# Altium PCB PocketLab_DMM_EVT0.PcbDoc (part 1 of 3)
Units mm, origin at the board's own origin, x right, y up, seen from the top; angles counter-clockwise.
Board outline 62 x 90 mm, 4 copper layers (Top Layer, GND, PWR_SIG, Bottom Layer), stack 1.04 mm thick; 103 components, 76 nets, 390 pads, 94 vias.
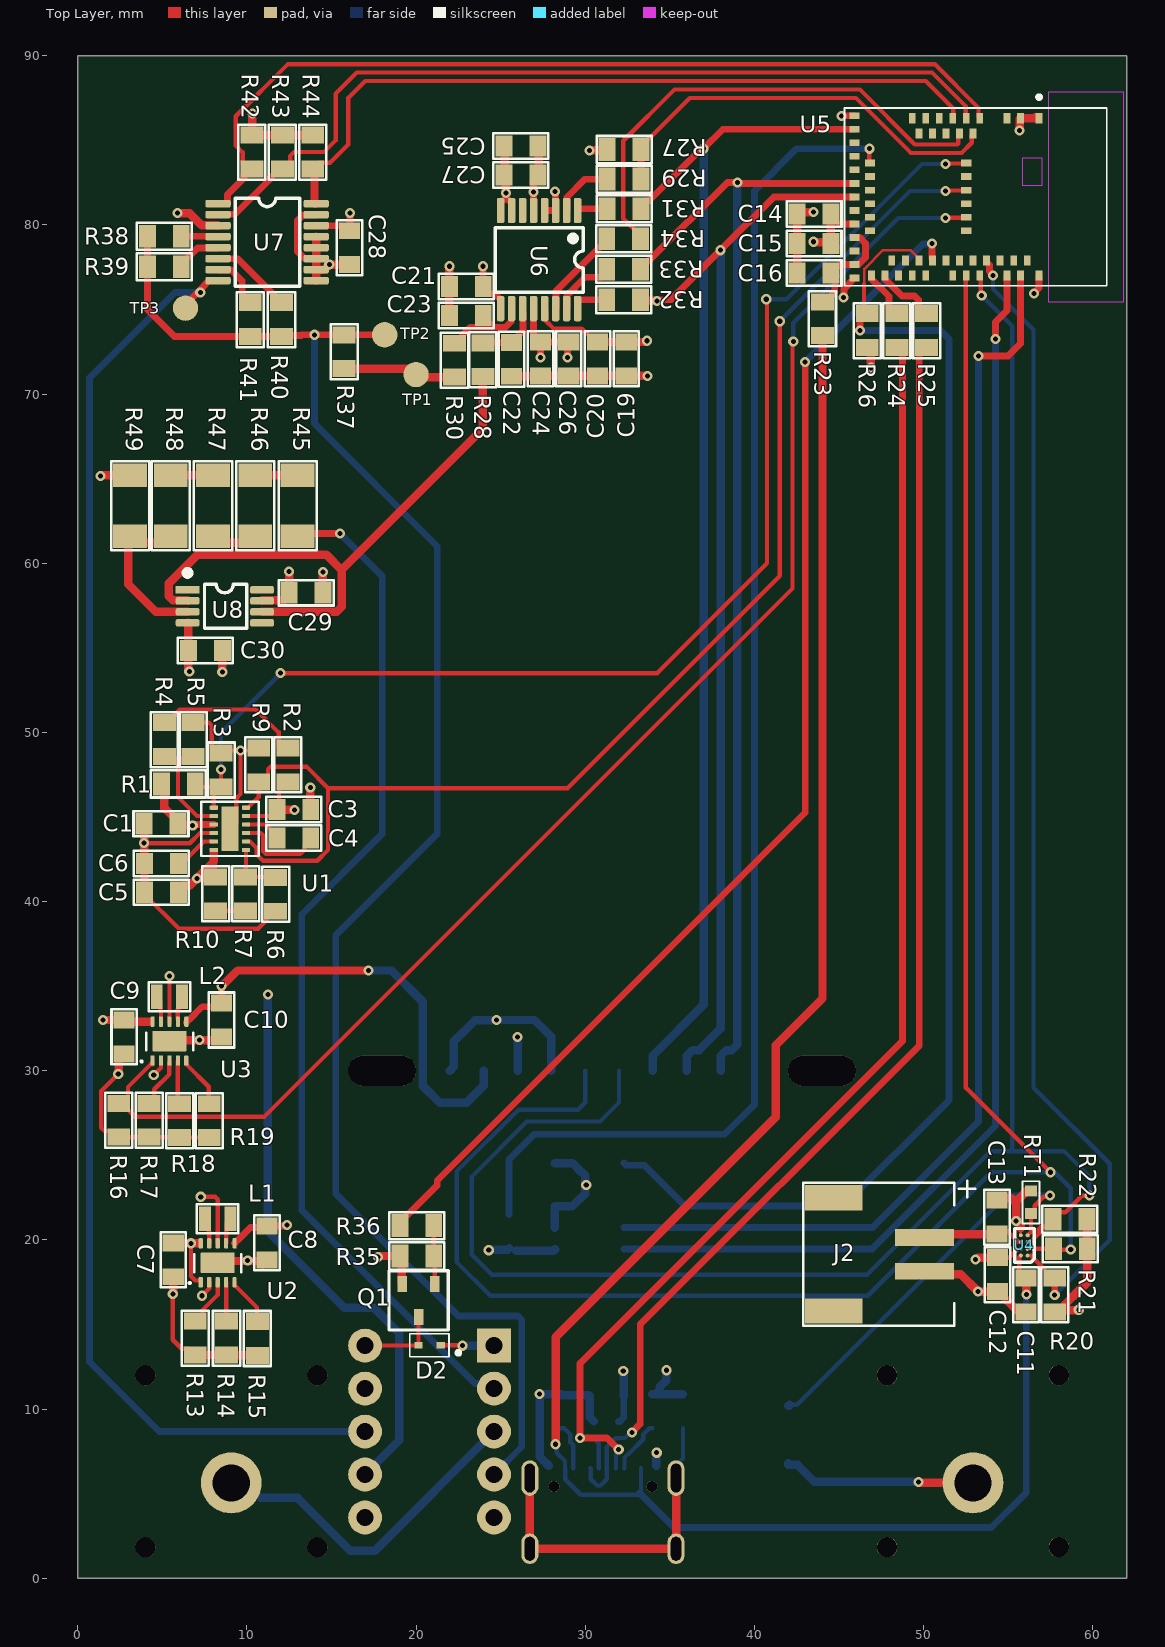
[diagram p0: Top Layer view]
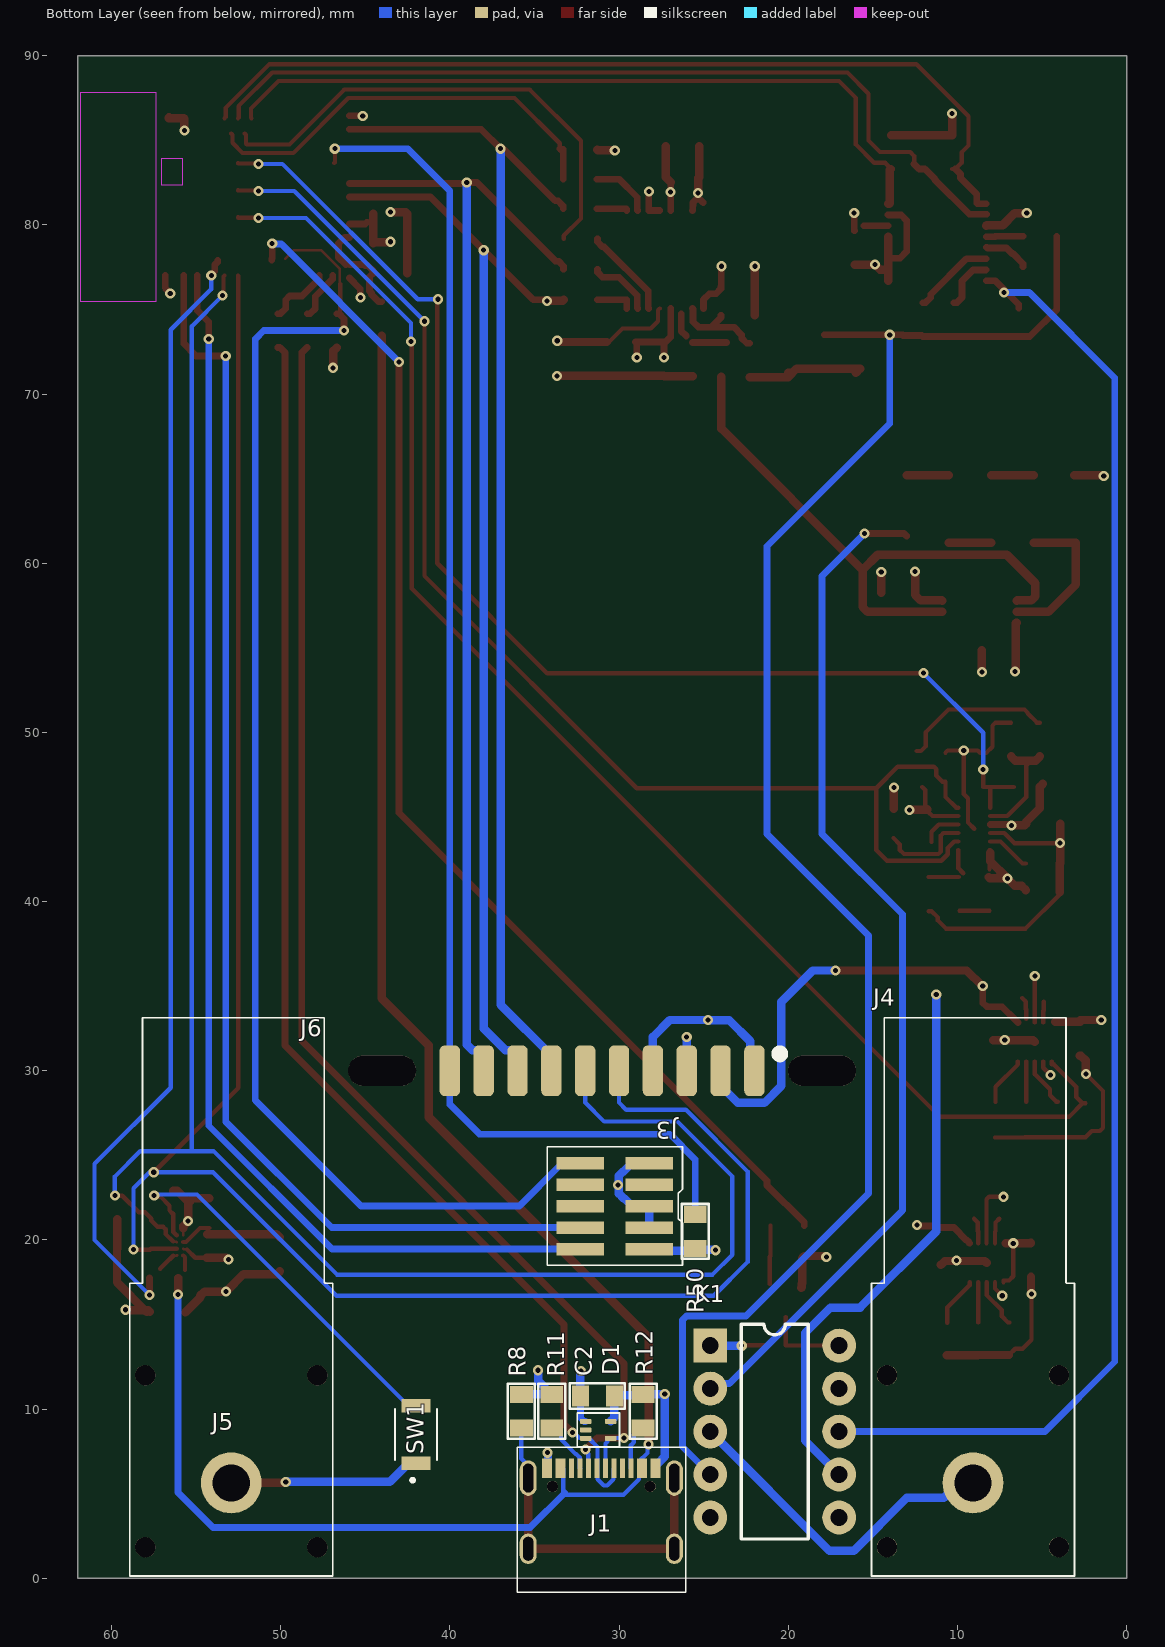
[diagram p1: Bottom Layer view, seen from below]
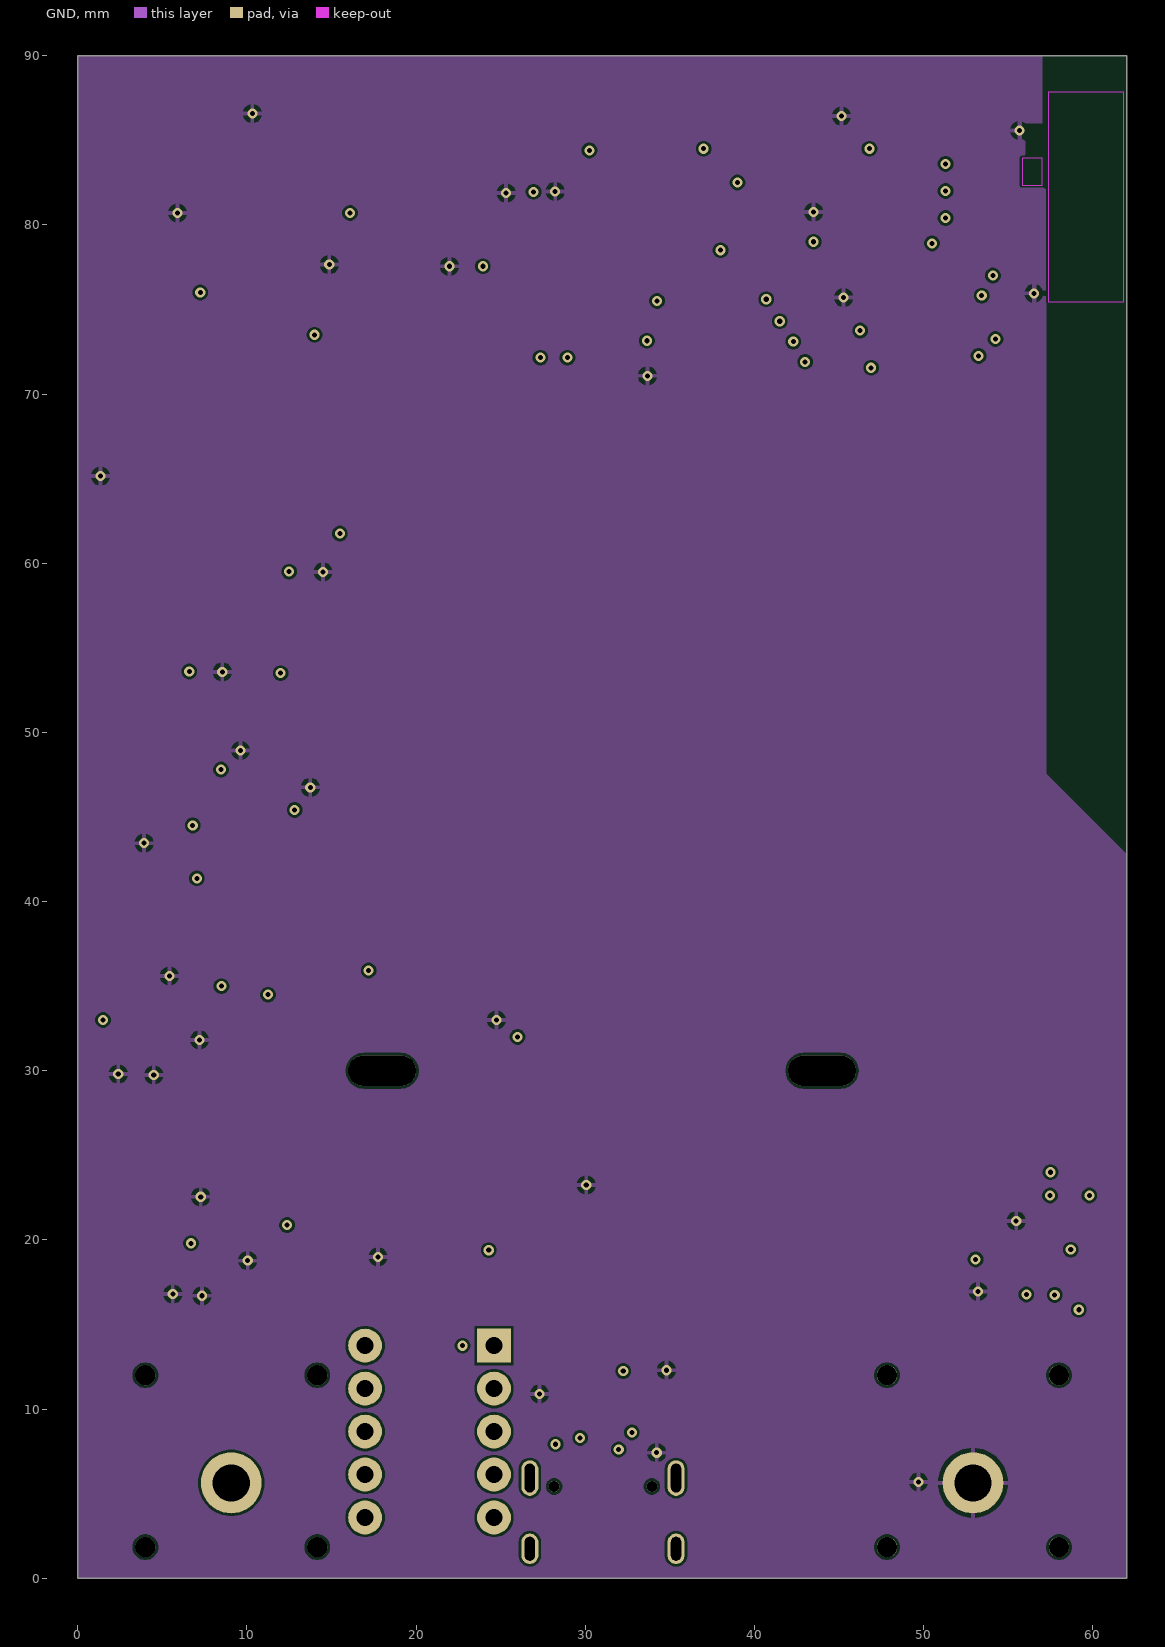
[diagram p2: GND]
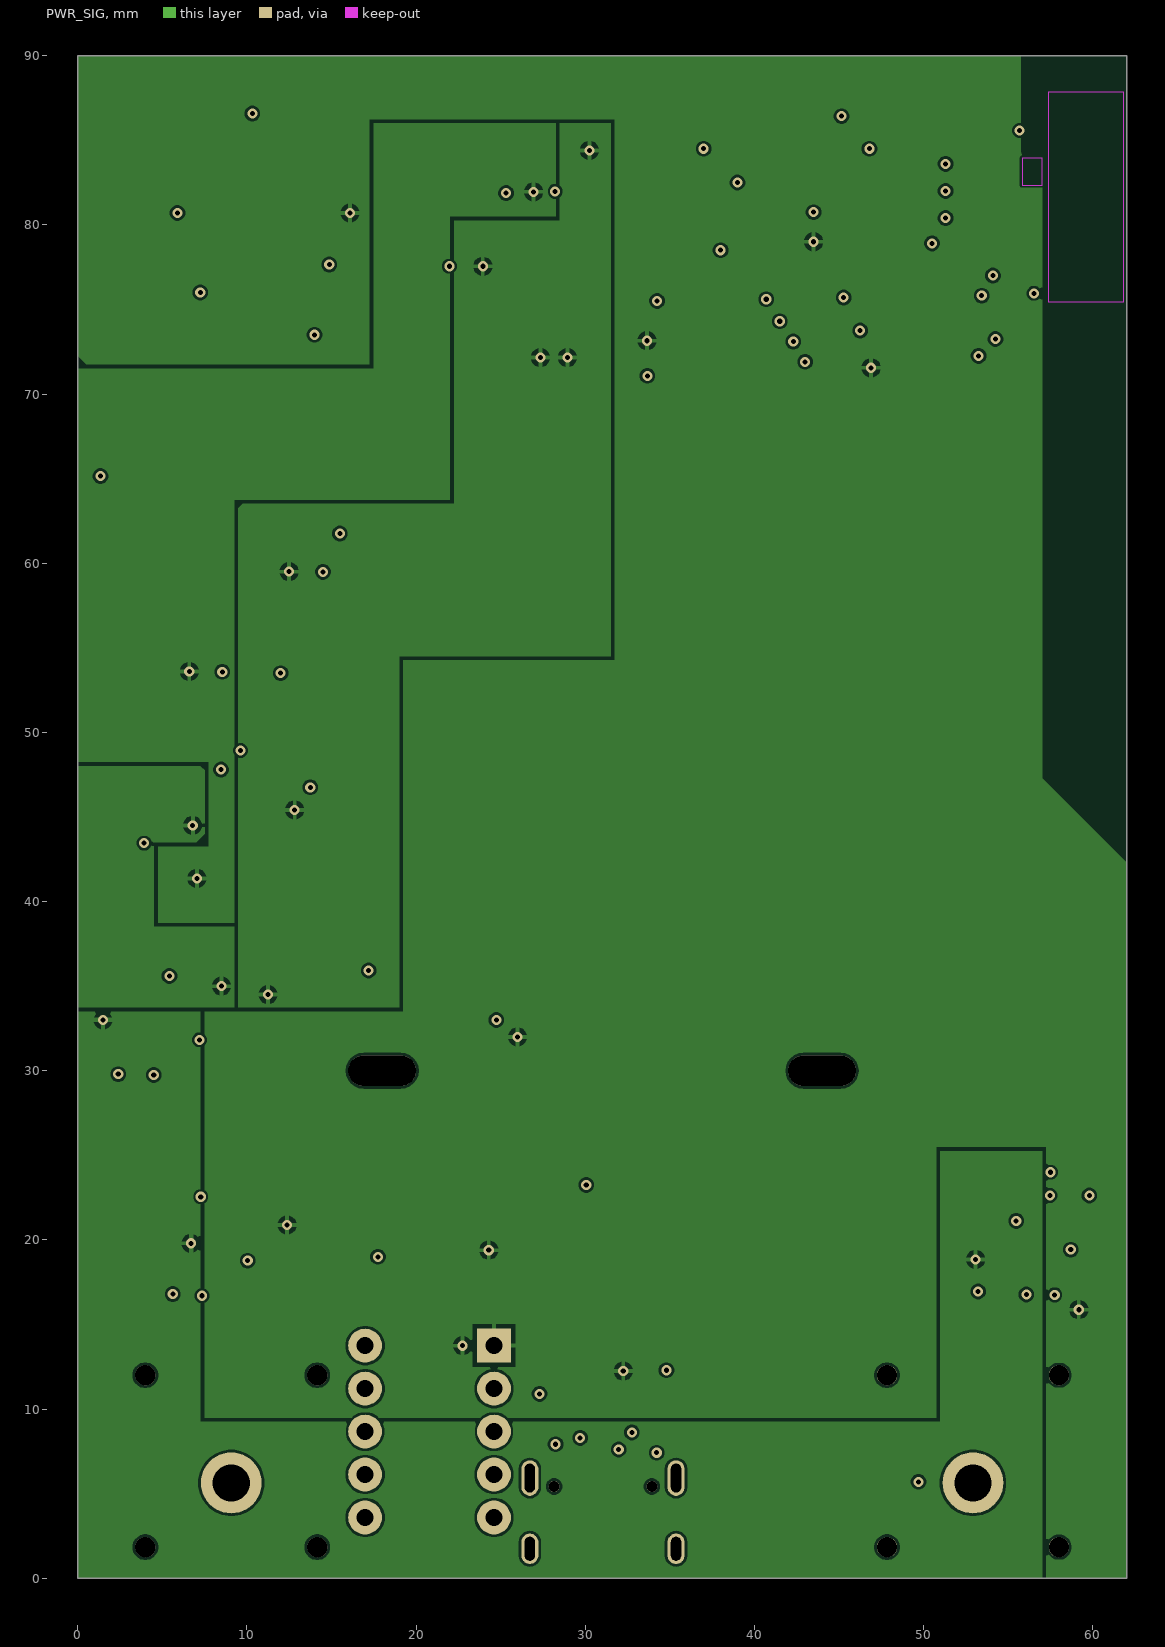
[diagram p3: PWR_SIG]
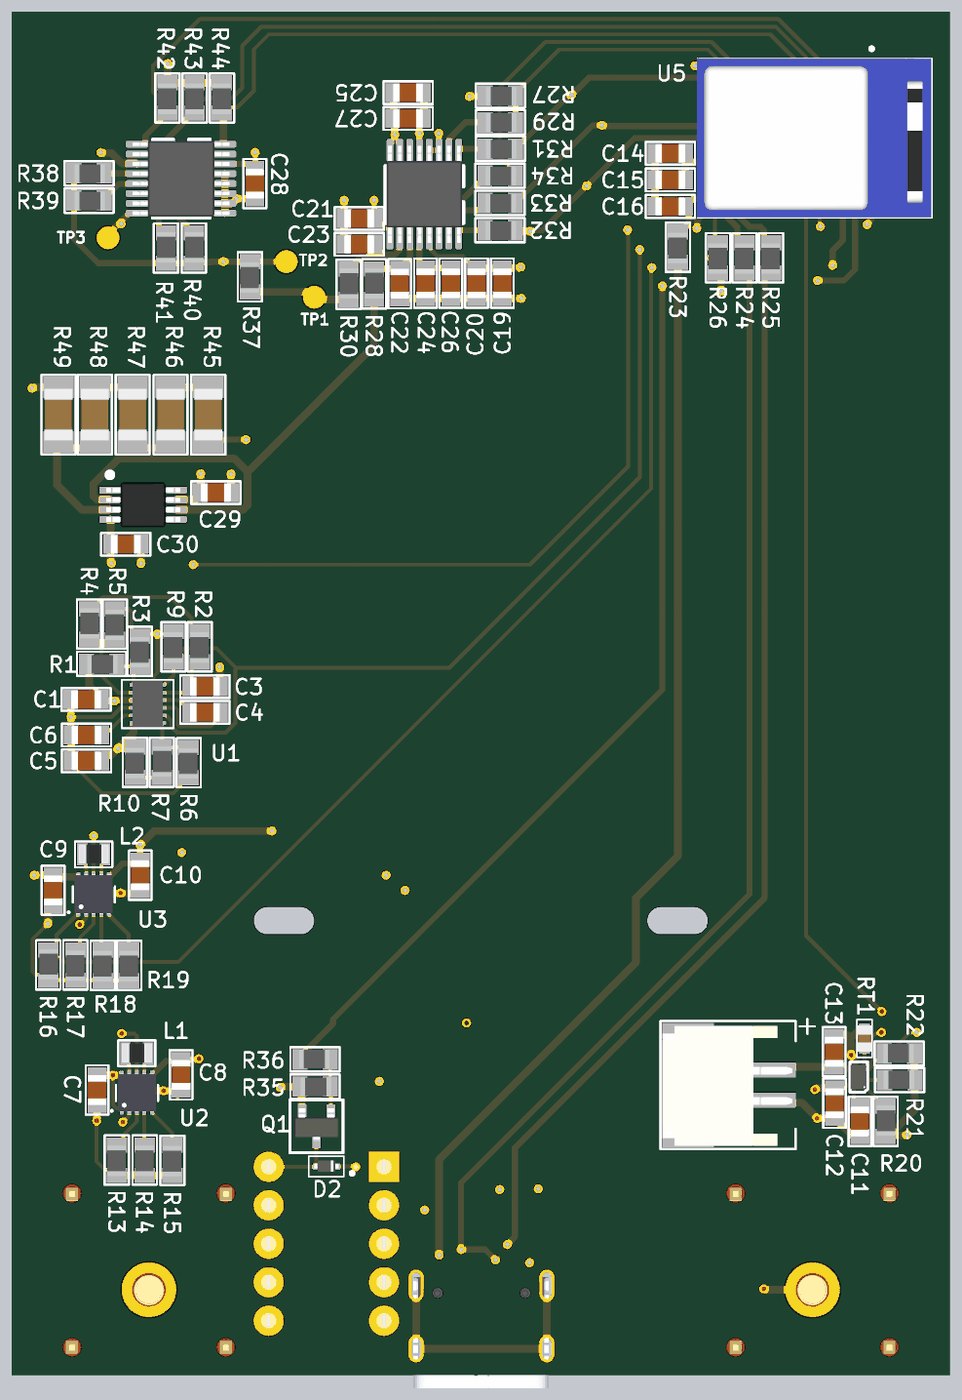
[diagram p4: 3D render of the assembled board from above, using the file's embedded part models]
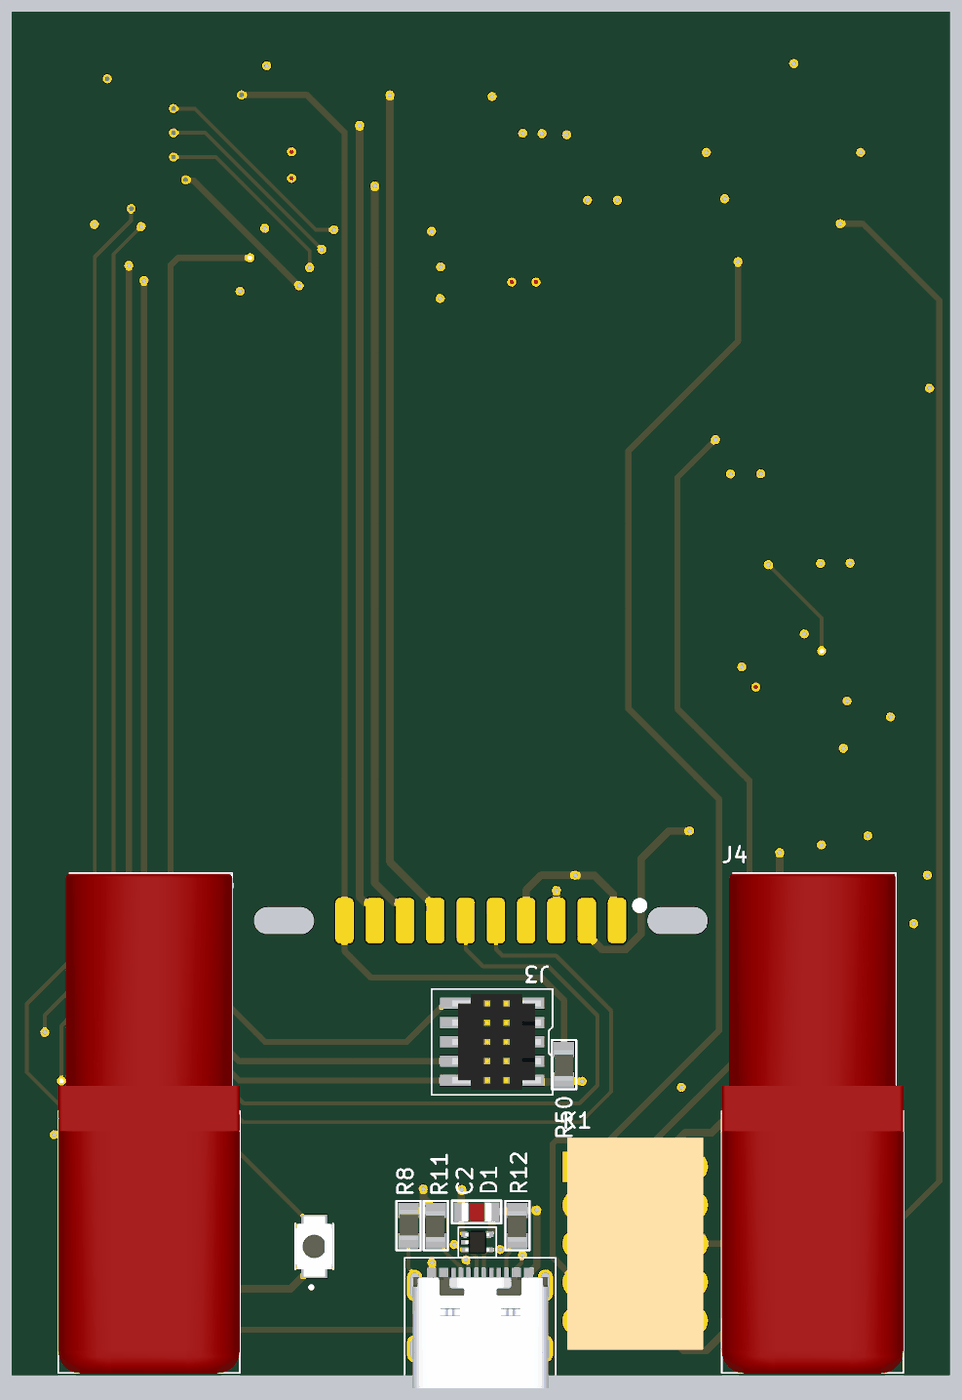
[diagram p5: 3D render of the assembled board from below, using the file's embedded part models]

## Layer stack, top to bottom
Top Solder: solder mask 0.0102, Solder Resist, Dk 3.5
Top Layer: signal copper 0.035
Dielectric 2: prepreg 0.15, PP-006, Dk 4.1
GND: signal copper 0.035
Dielectric 1: dielectric 0.6, FR-4, Dk 4.8
PWR_SIG: signal copper 0.035
Dielectric 3: prepreg 0.15, PP-006, Dk 4.1
Bottom Layer: signal copper 0.035
Bottom Solder: solder mask 0.0102, Solder Resist, Dk 3.5

## Board outline
0,0 0,90 62,90 62,0

## Design rules (kind name [scope] priority, off if disabled: settings)
Clearance [All] p1: gap=0.15 ignorepadtopadclearanceinfootprint=TRUE
PolygonConnect [All] p1: connectstyle=Relief reliefconductorwidth=0.254 reliefentries=4 polygonreliefangle="90 Angle" airgapwidth=0.254
RoutingVias [All] p1: holewidth=0.711 width=1.27 viastyle="Through Hole" minholewidth=0.3 minwidth=0.6 maxholewidth=0.3 maxwidth=0.6
SolderMaskExpansion [All] p1: expansion=0.05 istentingtop=FALSE
SupplyNets "Schematic Supply Nets_5" [InNet('3V3')] p1: voltage=0.000
SupplyNets "Schematic Supply Nets_4" [InNet('+2V5A')] p2: voltage=0.000
SupplyNets "Schematic Supply Nets_2" [InNet('-2V5A')] p3: voltage=0.000
SupplyNets "Schematic Supply Nets_1" [InNet('5V')] p4: voltage=0.000
SupplyNets "Schematic Supply Nets" [InNet('GND')] p5: voltage=0.000
Width [All] p1: maxlimit=0.5 minlimit=0.15 preferedwidth=0.254
30 further rules are at their usual default settings.

## Classes and differential pairs
component class 70_MODULE_INTERFACE: J4 J5 J6 R50
component class 60_RESISTANCE_FRONTEND: C28 R37 R38 R39 R40 R41 R42 R43 R44 TP1 TP2 TP3 U7
component class 50_VOLTAGE_FRONTEND: C29 C30 R45 R46 R47 R48 R49 U8
component class 40_INPUT_ROUTING: D2 K1 Q1 R35 R36
component class 30_ADC: C19 C20 C21 C22 C23 C24 C25 C26 C27 R27 R28 R29 R30 R31 R32 R33 R34 U6
component class 20_MCU_BLE: C14 C15 C16 J3 R23 R24 R25 R26 U5
component class 10_POWER: C1 C2 C3 C4 C5 C6 C7 C8 C9 C10 C11 C12 C13 D1 J1 J2 L1 L2 R1 R2 R3 R4 R5 R6 R7 R8 R9 R10 R11 R12 R13 R14 R15 R16 R17 R18 R19 R20 R21 R22 RT1 SW1 U1 U2 U3 U4

## Components (designator, comment, footprint, x,y, rotation, side; value= is the part's Value field where it differs from the comment)
C1 "4.7uF" C0805 4.927,44.602 r180 top
C2 "100nF" C0805 31.275,10.775 r180 bottom
C3 "2.2uF" C0805 12.777,45.452 r180 top
C4 "1.0uF" C0805 12.777,43.752 r0 top
C5 "2.2uF" C0805 4.952,40.552 r0 top
C6 "4.7uF" C0805 4.952,42.252 r0 top
C7 "10uF" C0805 5.65,18.825 r270 top
C8 "22uF" C0805 11.2,19.825 r90 top
C9 "10uF" C0805 2.75,32 r270 top
C10 "22uF" C0805 8.5,33 r90 top
C11 "1uF" C0805 56.05,16.75 r270 top
C12 "10uF" C0805 54.375,17.95 r270 top
C13 "1uF" C0805 54.35,21.35 r90 top
C14 "100nF" C0805 43.525,80.65 r180 top
C15 "10uF" C0805 43.525,78.9 r180 top
C16 "10uF" C0805 43.525,77.15 r180 top
C19 "1.0uF" C0805 32.425,72.075 r90 top
C20 "100nF" C0805 30.725,72.075 r90 top
C21 "100nF" C0805 22.975,76.35 r0 top
C22 "10nF" C0805 25.65,72.05 r270 top
C23 "10nF" C0805 22.975,74.65 r0 top
C24 "100nF" C0805 27.35,72.075 r90 top
C25 "100nF" C0805 26.2,84.65 r0 top
C26 "1.0uF" C0805 29.025,72.075 r90 top
C27 "1.0uF" C0805 26.2,82.95 r180 top
C28 "100nF" C0805 16.075,78.65 r90 top
C29 "100nF" C0805 13.5,58.25 r0 top
C30 "100nF" C0805 7.55,54.85 r0 top
D1 "TPD2E001DRLR" TPD2E001DRLR 31.975,9.275 r180 bottom value=1.5pF
D2 "1N914BWT" 1N914BWT 20.8,13.775 r180 top value=4pF
J1 "USB4105-GF-A" USB4105-GF-A 31.05,1.745 r180 bottom
J2 "S2B-PH-SM4-TB" S2B-PH-SM4-TB 48.3,19.15 r270 top
J3 "FTSH-105-01-L-DV-K" FTSH-105-01-L-DV-K 30.25,22 r90 bottom
J4 "FCR7350R/B" FCR7350_S16-PC 9.08,5.64 r270 bottom
J5 "FCR7350R/B" FCR7350_S16-PC 52.92,5.64 r270 bottom
J6 "10-PIN BUS" MODULE_BUS_10_TAB_SLOT 31,30 r0 bottom
K1 "TQ2-3V (ATQ201)" TQ2-3V 20.8,8.675 r180 bottom
L1 "2.2uH" WE_PMCI_201210 8.275,21.25 r0 top value=2.2µH
L2 "2.2uH" WE_PMCI_201210 5.425,34.375 r0 top value=2.2µH
Q1 "MMBT3904LT1G" MMBT3904 20.15,16.425 r180 top
R1 "11K" R0805 5.952,46.952 r0 top value=10kΩ
R2 "100K" R0805 12.427,48.077 r270 top value=10kΩ
R3 "21K" R0805 8.477,47.777 r270 top value=10kΩ
R4 "8.25K" R0805 5.127,49.577 r90 top value=10kΩ
R5 "100K" R0805 6.827,49.577 r270 top value=10kΩ
R6 "100K" R0805 11.702,40.427 r270 top value=10kΩ
R7 "5.1K" R0805 9.927,40.452 r90 top value=10kΩ
R8 "0R" R0805 35.775,9.875 r90 bottom value=10kΩ
R9 "100K" R0805 10.702,48.077 r270 top value=10kΩ
R10 "100K" R0805 8.152,40.452 r270 top value=10kΩ
R11 "5.1K" R0805 33.975,9.875 r270 bottom value=10kΩ
R12 "5.1K" R0805 28.575,9.875 r270 bottom value=10kΩ
R13 "36.5K" R0805 6.95,14.2 r270 top value=10kΩ
R14 "0R" R0805 8.8,14.2 r270 top value=10kΩ
R15 "16.2K" R0805 10.625,14.175 r270 top value=10kΩ
R16 "100K" R0805 2.425,27.075 r90 top value=10kΩ
R17 "36.5K" R0805 4.225,27.075 r270 top value=10kΩ
R18 "8.25K" R0805 6.025,27.05 r270 top value=10kΩ
R19 "36.5K" R0805 7.775,27.05 r270 top value=10kΩ
R20 "10K" R0805 57.75,16.75 r90 top value=10kΩ
R21 "10K" R0805 58.675,19.475 r180 top value=10kΩ
R22 "10K" R0805 58.65,21.225 r180 top value=10kΩ
R23 "2.2R" R0805 44.025,74.45 r270 top value=10kΩ
R24 "27R" R0805 48.425,73.75 r270 top value=10kΩ
R25 "27R" R0805 50.175,73.75 r270 top value=10kΩ
R26 "10K" R0805 46.675,73.75 r270 top value=10kΩ
R27 "10K" R0805 32.3,84.45 r0 top value=10kΩ
R28 "100R" R0805 23.95,72.025 r90 top value=10kΩ
R29 "100R" R0805 32.3,82.7 r0 top value=10kΩ
R30 "100R" R0805 22.275,72 r90 top value=10kΩ
R31 "100R" R0805 32.3,80.95 r0 top value=10kΩ
R32 "100R" R0805 32.275,75.575 r0 top value=10kΩ
R33 "100R" R0805 32.275,77.375 r0 top value=10kΩ
R34 "100R" R0805 32.275,79.175 r0 top value=10kΩ
R35 "100K" R0805 20.05,19.05 r0 top value=10kΩ
R36 "1K" R0805 20.05,20.85 r180 top value=10kΩ
R37 "10K" R0805 15.75,72.5 r270 top value=10kΩ
R38 "10K RREF" R0805 5.125,79.325 r0 top value=10kΩ
R39 "100K RREF" R0805 5.125,77.525 r0 top value=10kΩ
R40 "360K RREF" R0805 12.05,74.4 r90 top value=10kΩ
R41 "1M RREF" R0805 10.2,74.4 r90 top value=10kΩ
R42 "100K" R0805 10.3,84.3 r270 top value=10kΩ
R43 "100K" R0805 12.1,84.3 r270 top value=10kΩ
R44 "100K" R0805 13.9,84.3 r270 top value=10kΩ
R45 "3M" R1206 13,63.4 r90 top value=3MΩ
R46 "3M" R1206 10.5,63.4 r270 top value=3MΩ
R47 "3M" R1206 8,63.4 r90 top value=3MΩ
R48 "3M" R1206 5.5,63.4 r270 top value=3MΩ
R49 "360K" R1206 3.1,63.4 r270 top value=360kΩ
R50 "10K" R0805 25.5,20.5 r270 bottom value=10kΩ
RT1 "T10K" NCU18_1608 56.35,22.225 r270 top value=10kΩ
SW1 "B3U-1000P" B3U-1000P 42,8.5 r90 bottom
TP1 "TEST POINT" TP_SMD_1P5MM 20,71.15 r180 top
TP2 "TEST POINT" TP_SMD_1P5MM 18.15,73.5 r180 top
TP3 "TEST POINT" TP_SMD_1P5MM 6.375,75.075 r0 top
U1 "LM27762" LM27762 9.002,44.302 r0 top
U2 "TPS63900DSKR" TPS63900 8.275,18.65 r90 top
U3 "TPS63900DSKR" TPS63900 5.425,31.75 r90 top
U4 "BQ25180YBGR" BQ25180 55.95,19.675 r180 top
U5 "MDBT50Q-1MV2" NRF52840_MDBT50Q-1MV2 53.125,81.65 r270 top
U6 "ADS1220IPWR" ADS1220IPWR 27.275,77.95 r270 top
U7 "TMUX1109PWR" TMUX1109PWR 11.2,78.975 r0 top value=2.5Ω
U8 "OPA197IDGKR" OPA197IDGKR 8.697,57.45 r0 top

## Footprints (in the part's own frame and the unit in brackets; to place one, negate y for a bottom-side part, rotate by r counter-clockwise, add the part's x,y. Pads: shape width x height; smd on the part's side, far side on the other; paste and mask are expansions set on the pad)
1N914BWT [mm]
  rect 0.48x0.4 smd: 1(-0.66,0) 2(0.66,0)
  silkscreen extent -1.8,-0.67 1.17,0.67, body extent -0.8,-0.43 0.8,0.37, height 0.71
ADS1220IPWR [mm]
  rrect50% 1.5x0.45 smd mask+0.05: 1(-2.9,2.275) 2(-2.9,1.625) 3(-2.9,0.975) 4(-2.9,0.325) 5(-2.9,-0.325) 6(-2.9,-0.975) 7(-2.9,-1.625) 8(-2.9,-2.275) 9(2.9,-2.275) 10(2.9,-1.625) 11(2.9,-0.975) 12(2.9,-0.325) 13(2.9,0.325) 14(2.9,0.975) 15(2.9,1.625) 16(2.9,2.275)
  silkscreen extent -1.88,-2.6 1.93,2.6, body extent -3.2,-2.5 3.2,2.5, height 1.13
B3U-1000P [mm]
  rect 0.8x1.7 smd: 1(-1.7,0) 2(1.7,0)
  silkscreen extent -2.8,-1.25 1.5,1.25, body extent -2,-1.25 2,1.25, height 1.76
BQ25180 [mm]
  round 0.23 smd paste-2539.97 mask+0.025: A1(-0.2,0.6) A2(0.2,0.6) B1(-0.2,0.2) B2(0.2,0.2) C1(-0.2,-0.2) C2(0.2,-0.2) D1(-0.2,-0.6) D2(0.2,-0.6)
  silkscreen extent -0.6,-1 0.55,1, body extent -0.52,-0.79 0.52,0.79, height 0.5
C0805 [mm]
  rect 1x1.25 smd: 1(-1,0) 2(1,0)
  silkscreen extent -1.63,-0.75 1.63,0.75, body extent -1,-0.63 1,0.63, height 1.41
FCR7350_S16-PC [mm] "Banana Jack Connector Standard Banana Solder"
  round 3.6 hole 2.2 paste-2539.97 mask+0.1: 1(0,0)
  round 1.2 hole 1.2 unplated paste-2539.97: M1(-6.36,5.08) M2(3.8,5.08) M3(3.8,-5.08) M4(-6.36,-5.08)
  silkscreen extent -27.5,-6 5.5,6, body extent -27.47,-6 5.53,6, height 11.51
FTSH-105-01-L-DV-K [mm] "CONN HEADER SMD 10POS 1.27MM"
  rect 0.74x2.8 smd: 1(-2.54,-2.04) 2(-2.54,2.04) 3(-1.27,-2.04) 4(-1.27,2.04) 5(0,-2.04) 6(0,2.04) 7(1.27,-2.04) 8(1.27,2.04) 9(2.54,-2.04) 10(2.54,2.04)
  silkscreen extent -3.5,-4 3.5,4, body extent -3.18,-3.22 3.17,2.62, height 6.13
LM27762 [mm] "IC REG CHARGE PUMP ADJ DL 12WSON"
  rrect40% 0.5x0.25 smd mask+0.05: 1(-0.95,1.25) 2(-0.95,0.75) 3(-0.95,0.25) 4(-0.95,-0.25) 5(-0.95,-0.75) 6(-0.95,-1.25) 7(0.95,-1.25) 8(0.95,-0.75) 9(0.95,-0.25) 10(0.95,0.25) 11(0.95,0.75) 12(0.95,1.25)
  rect 1x2.65 smd paste-2539.97 mask+0.05: 13(0,0)
  silkscreen extent -1.7,-1.6 1.7,1.6, body extent -1,-1.5 1,1.5, height 0.8
MMBT3904 [mm]
  rect 0.56x0.95 smd mask+0.05: 1(-0.95,-0.975) 2(0.95,-0.975) 3(0,0.975)
  silkscreen extent -1.75,-1.75 1.75,1.75, body extent -1.45,-1.2 1.45,1.29, height 1.12
MODULE_BUS_10_TAB_SLOT [mm] "10-pin stackable module interface for power, I2C, SPI, and shared interrupt"
  rrect50% 1.2x3 smd paste-2539.97 mask+0.1: 1(-9,0) 2(-7,0) 3(-5,0) 4(-3,0) 5(-1,0) 6(1,0) 7(3,0) 8(5,0) 9(7,0) 10(9,0)
  oval 4x1.8 hole 1.8 slot 4 at 0 deg unplated paste-2539.97: SLOT_L(-13,0) SLOT_R(13,0)
  silkscreen extent -10.75,-1.25 -10.25,-0.75
NCU18_1608 [mm]
  rect 0.65x0.7 smd: 1(-0.675,0) 2(0.675,0)
  silkscreen extent -1.25,-0.5 1.25,0.5, body extent -0.88,-0.47 0.88,0.47, height 0.94
NRF52840_MDBT50Q-1MV2 [mm]
  rect 0.6x0.4 smd mask+0.05: 1(-4.65,3.7) 2(-4.65,2.6) 3(-4.65,1.8) 4(-4.65,0.2) 5(-3.75,-0.2) 6(-4.65,-0.6) 7(-3.75,-1) 8(-4.65,-1.4) 9(-3.75,-1.8) 10(-4.65,-2.2) 11(-3.75,-2.6) 12(-4.65,-3) 13(-3.75,-3.4) 14(-4.65,-3.8) 34(4.65,-6.2) 35(4.65,-5.4) 36(3.75,-5) 37(4.65,-4.6) 38(3.75,-4.2) 39(4.65,-3.8) 40(3.75,-3.4) 41(4.65,-3) 42(3.75,-2.6) 43(3.75,-1.8) 44(4.65,-1.4) 45(3.75,-1) 46(4.65,-0.6) 47(3.75,-0.2) 48(4.65,0.2) 49(3.75,0.6) 50(3.75,1.4) 51(4.65,1.8) 52(3.75,2.2) 53(4.65,2.6) 54(3.75,3) 55(4.65,3.7)
  rect 0.4x0.6 smd mask+0.05: 15(-4.8,-7.2) 16(-4,-7.2) 17(-3.2,-7.2) 18(-2.4,-7.2) 19(-2,-6.3) 20(-1.6,-7.2) 21(-1.2,-6.3) 22(-0.8,-7.2) 23(-0.4,-6.3) 24(0,-7.2) 25(0.4,-6.3) 26(0.8,-7.2) 27(1.2,-6.3) 28(1.6,-7.2) 29(2,-6.3) 30(2.4,-7.2) 31(3.2,-7.2) 32(4,-7.2) 33(4.8,-7.2) 56(-2,-0.6) 57(-1.2,-0.6) 58(-0.4,-0.6) 59(0.4,-0.6) 60(1.2,-0.6) 61(2,-0.6)
  Keep-Out Layer region: -2.3,2.7 -0.7,2.7 -0.7,3.9 -2.3,3.9
  Keep-Out Layer region: -6.2,4.25 6.2,4.25 6.2,8.7 -6.2,8.7
  silkscreen extent -6,-7.8 5.25,7.7, body extent -5.25,-7.85 5.25,7.65, height 2.07
OPA197IDGKR [mm] "IC OPAMP GP 1 CIRCUIT 8VSSOP"
  rect 1.4x0.45 smd mask+0.05: 1(-2.2,0.975)
  rrect50% 1.4x0.45 smd mask+0.05: 2(-2.2,0.325) 3(-2.2,-0.325) 4(-2.2,-0.975) 5(2.2,-0.975) 6(2.2,-0.325) 7(2.2,0.325) 8(2.2,0.975)
  silkscreen extent -2.3,-1.3 1.3,2.07, body extent -2.45,-1.5 2.45,1.5, height 1.1
R0805 [mm]
  rect 1x1.35 smd: 1(-1,0) 2(1,0)
  silkscreen extent -1.63,-0.8 1.63,0.8, body extent -0.95,-0.65 1.05,0.6, height 0.56
R1206 [mm]
  rect 1.4x2 smd: 1(-1.8,0) 2(1.8,0)
  silkscreen extent -2.63,-1.12 2.63,1.12, body extent -1.7,-0.93 1.7,0.93, height 0.56
S2B-PH-SM4-TB [mm] "SMD-JST"
  rect 1x3.5 smd paste+0: 1(-1,1.75) 2(1,1.75)
  rect 1.5x3.4 smd paste-2539.97: M1(-3.35,-3.6) M2(3.35,-3.6)
  silkscreen extent -4.36,-5.43 4.22,4.76, body extent -3.9,-5.3 4,3.3, height 5.42
TMUX1109PWR [mm]
  rrect50% 1.5x0.45 smd mask+0.05: 1(-2.9,2.275) 2(-2.9,1.625) 3(-2.9,0.975) 4(-2.9,0.325) 5(-2.9,-0.325) 6(-2.9,-0.975) 7(-2.9,-1.625) 8(-2.9,-2.275) 9(2.9,-2.275) 10(2.9,-1.625) 11(2.9,-0.975) 12(2.9,-0.325) 13(2.9,0.325) 14(2.9,0.975) 15(2.9,1.625) 16(2.9,2.275)
  silkscreen extent -1.88,-2.6 1.93,2.6, body extent -3.2,-2.5 3.2,2.5, height 1.13
TP_SMD_1P5MM [mm] "Single pad test point"
  round 1.5 smd paste-2539.97 mask+0.1: 1(0,0)
TPD2E001DRLR [mm]
  rrect33% 0.67x0.3 smd mask+0.05: 1(0,0) 2(0,-0.5) 3(0,-1) 4(1.48,0) 5(1.48,-1)
  silkscreen extent -0.5,-1.5 2,0.5, body extent -0.05,-1.28 1.55,0.28, height 0.6
TPS63900 [mm] "IC REG BUCK BST PROG 400MA 10SON"
  rrect40% 0.6x0.25 smd mask+0.05: 1(-1.15,1) 2(-1.15,0.5) 3(-1.15,0) 4(-1.15,-0.5) 5(-1.15,-1) 6(1.15,-1) 7(1.15,-0.5) 8(1.15,0) 9(1.15,0.5) 10(1.15,1)
  rrect5% 1.2x2 smd paste-2539.97 mask+0.05: 11(0,0)
  silkscreen extent -1.26,-1.4 0.5,1.71, body extent -1.3,-1.25 1.3,1.25, height 0.8
TQ2-3V [mm]
  rect 2x2 hole 1: 1(-3.81,5.08)
  round 2 hole 1: 2(-3.81,2.54) 3(-3.81,0) 4(-3.81,-2.54) 5(-3.81,-5.08) 6(3.81,-5.08) 7(3.81,-2.54) 8(3.81,0) 9(3.81,2.54) 10(3.81,5.08)
  silkscreen extent -1.97,-6.35 1.97,6.35, body extent -4.5,-6.99 4.5,7, height 5
USB4105-GF-A [mm] "USB2.0 TYP C 16P SMD RA"
  rect 0.3x1.15 smd mask+0.05: A1(-3.35,4.755) A4(-2.55,4.755) A5(-1.25,4.755) A6(-0.25,4.755) A7(0.25,4.755) A8(1.25,4.755) A9(2.55,4.755) A12(3.35,4.755) B1(3.05,4.755) B1(3.05,4.755) B4(2.25,4.755) B5(1.75,4.755) B6(0.75,4.755) B7(-0.75,4.755) B8(-1.75,4.755) B9(-2.25,4.755) B12(-3.05,4.755)
  round 0.65 hole 0.65 unplated paste-2539.97 mask+0.05: MH1(-2.89,3.68) MH2(2.89,3.68)
  oval 1x2.1 hole 0.6 slot 1.7 at 90 deg paste-2539.97 mask+0.05: SHIELD1(-4.32,4.18) SHIELD2(4.32,4.18)
  oval 1x1.8 hole 0.6 slot 1.4 at 90 deg paste-2539.97 mask+0.05: SHIELD3(-4.32,0) SHIELD4(4.32,0)
  silkscreen extent -4.97,-2.58 5,6, body extent -4.44,-2.63 4.5,5.08, height 3.17
WE_PMCI_201210 [mm]
  rect 0.7x1.45 smd: 1(-0.75,0) 2(0.75,0)
  silkscreen extent -1.22,-0.85 1.22,0.85, body extent -1,-0.6 1,0.65, height 1.01

## Part data
C1 C2 C3 C4 C5 C6 C7 C8 C9 C10 C11 C12 C13 C14 C15 C16 C19 C20 C21 C22 C23 C24 C25 C26 C27 C28 C29 C30: library part C_0805
D1: "TVS DIODE 5.5VWM SOT5", Ambient Temperature Range High=85°C, Breakdown Voltage=11V, Case/Package=SOT, Clamping Voltage=105.5V, Leakage Current=1nA, Manufacturer="Texas Instruments", Manufacturer Lifecycle Status=ACTIVE, Max Junction Temperature (Tj)=150°C, Max Supply Voltage=5.5V, Min Operating Temperature=-40°C, Min Supply Voltage=900mV, Peak Pulse Current=10A, Power Line Protection=Yes, Supplier Part Number=296-21883-1-ND, Category="TVS Diodes", ComponentLink1Description=https://sigma.octopart.com:443/181443230/technical_drawing/Texas-Instruments-TPD2E001DRLR.pdf?src-supplier=Texas+Instruments, ComponentLink1URL=https://sigma.octopart.com:443/181443230/technical_drawing/Texas-Instruments-TPD2E001DRLR.pdf?src-supplier=Texas+Instruments, ComponentLink2Description=https://octopart.com:443/opatz8j6/c1?t=LqR2T5dhtvY9fnpxm98ZmwTx2KiqwpTyiDh4fmM8LmA1Hdyy6Z2mouOGGfsyM_omQ8P5IG0puZB1FIHZzhg0KJLvuNDHe3DDIqJ06AtV8pixDYd3BFmVklDIB3kX-o173eNR4-Luk47j3Y2XPujUjAfL1QiTI-7Lwb7SjnJyfkP_0unbRDdGCGpXHS615Fdjh3G7NsLJ85TzDAC1d_IMlnk34_uqrgLYYqRua-puyyypeO8uz9sLuYmHH6Sbc_DvL2ro0fk8buRAQwE3oFAo5beh5rCnqbsY_N3VX2fm8SsZ707DKbb4CQjIrKArFyjIUZXCjzc8_URAOlXvyifWFdRvtoDMS1TxXzD8kCEUEJBHoB0mYqXmgSj3ODXeASq6-Iu83Q&src-supplier=Texas+Instruments, ComponentLink2URL=https://octopart.com:443/opatz8j6/c1?t=LqR2T5dhtvY9fnpxm98ZmwTx2KiqwpTyiDh4fmM8LmA1Hdyy6Z2mouOGGfsyM_omQ8P5IG0puZB1FIHZzhg0KJLvuNDHe3DDIqJ06AtV8pixDYd3BFmVklDIB3kX-o173eNR4-Luk47j3Y2XPujUjAfL1QiTI-7Lwb7SjnJyfkP_0unbRDdGCGpXHS615Fdjh3G7NsLJ85TzDAC1d_IMlnk34_uqrgLYYqRua-puyyypeO8uz9sLuYmHH6Sbc_DvL2ro0fk8buRAQwE3oFAo5beh5rCnqbsY_N3VX2fm8SsZ707DKbb4CQjIrKArFyjIUZXCjzc8_URAOlXvyifWFdRvtoDMS1TxXzD8kCEUEJBHoB0mYqXmgSj3ODXeASq6-Iu83Q&src-supplier=Texas+Instruments, ComponentLink3Description=https://datasheet.octopart.com:443/TPD2E001DRLR-Texas-Instruments-datasheet-37738713.pdf?src-supplier=Texas+Instruments, ComponentLink3URL=https://datasheet.octopart.com:443/TPD2E001DRLR-Texas-Instruments-datasheet-37738713.pdf?src-supplier=Texas+Instruments, ComponentLink4Description=https://sigma.octopart.com:443/178868977/technical_drawing/Texas-Instruments-TPD2E001DRLR.pdf?src-supplier=Texas+Instruments, ComponentLink4URL=https://sigma.octopart.com:443/178868977/technical_drawing/Texas-Instruments-TPD2E001DRLR.pdf?src-supplier=Texas+Instruments, ComponentLink5Description=https://sigma.octopart.com:443/149978402/technical_drawing/Texas-Instruments-TPD2E001DRLR.pdf?src-supplier=Texas+Instruments, ComponentLink5URL=https://sigma.octopart.com:443/149978402/technical_drawing/Texas-Instruments-TPD2E001DRLR.pdf?src-supplier=Texas+Instruments, ComponentLink6Description=https://datasheet.octopart.com:443/TPD2E001DRLR-Texas-Instruments-datasheet-21096186.pdf?src-supplier=Texas+Instruments, ComponentLink6URL=https://datasheet.octopart.com:443/TPD2E001DRLR-Texas-Instruments-datasheet-21096186.pdf?src-supplier=Texas+Instruments, ComponentLink7Description=https://datasheet.octopart.com:443/TPD2E001DRLR-Texas-Instruments-datasheet-10824604.pdf?src-supplier=Texas+Instruments, ComponentLink7URL=https://datasheet.octopart.com:443/TPD2E001DRLR-Texas-Instruments-datasheet-10824604.pdf?src-supplier=Texas+Instruments, ComponentLink8Description=https://datasheet.octopart.com:443/TPD2E001DRLR-Texas-Instruments-datasheet-10670688.pdf?src-supplier=Texas+Instruments, ComponentLink8URL=https://datasheet.octopart.com:443/TPD2E001DRLR-Texas-Instruments-datasheet-10670688.pdf?src-supplier=Texas+Instruments, ComponentLink9Description=https://datasheet.octopart.com:443/TPD2E001DRLR-Texas-Instruments-datasheet-10258578.pdf?src-supplier=Texas+Instruments, ComponentLink9URL=https://datasheet.octopart.com:443/TPD2E001DRLR-Texas-Instruments-datasheet-10258578.pdf?src-supplier=Texas+Instruments, ComponentLink10Description=https://datasheet.octopart.com:443/TPD2E001DRLR-Texas-Instruments-datasheet-153022.pdf?src-supplier=Texas+Instruments, ComponentLink10URL=https://datasheet.octopart.com:443/TPD2E001DRLR-Texas-Instruments-datasheet-153022.pdf?src-supplier=Texas+Instruments, ComponentLink11Description=https://sigma.octopart.com:443/49249896/technical_drawing/Texas-Instruments-TPD2E001DRLR.pdf?src-supplier=Texas+Instruments, ComponentLink11URL=https://sigma.octopart.com:443/49249896/technical_drawing/Texas-Instruments-TPD2E001DRLR.pdf?src-supplier=Texas+Instruments, ComponentLink12Description=https://datasheet.octopart.com:443/TPD2E001DRLR-Texas-Instruments-datasheet-32015767.pdf?src-supplier=Farnell, ComponentLink12URL=https://datasheet.octopart.com:443/TPD2E001DRLR-Texas-Instruments-datasheet-32015767.pdf?src-supplier=Farnell, ComponentLink13Description=https://datasheet.octopart.com:443/TPD2E001DRLR-Texas-Instruments-datasheet-12491271.pdf?src-supplier=Farnell, ComponentLink13URL=https://datasheet.octopart.com:443/TPD2E001DRLR-Texas-Instruments-datasheet-12491271.pdf?src-supplier=Farnell, ComponentLink14Description=https://datasheet.octopart.com:443/TPD2E001DRLR-Texas-Instruments-datasheet-66807720.pdf?src-supplier=Farnell, ComponentLink14URL=https://datasheet.octopart.com:443/TPD2E001DRLR-Texas-Instruments-datasheet-66807720.pdf?src-supplier=Farnell, ComponentLink15Description=https://datasheet.octopart.com:443/TPD2E001DRLR-Texas-Instruments-datasheet-24570227.pdf?src-supplier=Farnell, ComponentLink15URL=https://datasheet.octopart.com:443/TPD2E001DRLR-Texas-Instruments-datasheet-24570227.pdf?src-supplier=Farnell, ComponentLink16Description=https://datasheet.octopart.com:443/TPD2E001DRLR-Texas-Instruments-datasheet-16079961.pdf?src-supplier=Newark, ComponentLink16URL=https://datasheet.octopart.com:443/TPD2E001DRLR-Texas-Instruments-datasheet-16079961.pdf?src-supplier=Newark, ComponentLink17Description=https://datasheet.octopart.com:443/TPD2E001DRLR-Texas-Instruments-datasheet-159117907.pdf?src-supplier=LCSC, ComponentLink17URL=https://datasheet.octopart.com:443/TPD2E001DRLR-Texas-Instruments-datasheet-159117907.pdf?src-supplier=LCSC, ComponentLink18Description=https://datasheet.octopart.com:443/TPD2E001DRLR-Texas-Instruments-datasheet-137316104.pdf?src-supplier=Future+Electronics, ComponentLink18URL=https://datasheet.octopart.com:443/TPD2E001DRLR-Texas-Instruments-datasheet-137316104.pdf?src-supplier=Future+Electronics, ComponentLink19Description=https://datasheet.octopart.com:443/TPD2E001DRLR-Texas-Instruments-datasheet-14047829.pdf?src-supplier=iiiC, ComponentLink19URL=https://datasheet.octopart.com:443/TPD2E001DRLR-Texas-Instruments-datasheet-14047829.pdf?src-supplier=iiiC, ComponentLink20Description=http://sigma.octopart.com:80/reach_statement/Texas-Instruments-company-64.pdf?src-supplier=Compliance+Statements, ComponentLink20URL=http://sigma.octopart.com:80/reach_statement/Texas-Instruments-company-64.pdf?src-supplier=Compliance+Statements, ComponentLink21Description=http://sigma.octopart.com:80/conflict_mineral_statement/Texas-Instruments-company-63.pdf?src-supplier=Compliance+Statements, ComponentLink21URL=http://sigma.octopart.com:80/conflict_mineral_statement/Texas-Instruments-company-63.pdf?src-supplier=Compliance+Statements, Contact Plating=Gold, Depth=1.2mm, Direction=Unidirectional, Element Configuration=Dual, Height=0m, Interface="Ethernet, LVDS", Lead Free="Lead Free", Length=1.6mm, Lifecycle Status=Production, Manufacturer Part Number=TPD2E001DRLR, Max Operating Temperature=85°C, Min Breakdown Voltage=11V, Number of Bidirectional Channels=2, Number of Channels=2, Number of Outputs=2, Operating Supply Voltage=5.5V, Pins=5, Polarity=Unidirectional, Pricing="1=0.94, 10=0.581, 50=0.426, 100=0.3757, 500=0.28718, 4000=0.21438, 12000=0.1887 (USD)", Radiation Hardening=No, REACH SVHC=No, Reverse Standoff Voltage=5.5V, RoHS=Compliant, Schedule B="8541100080, 8541100080|8541100080|8541100080|8541100080|8541100080", Stock=58515, Supplier=DigiKey, Termination=SMD/SMT, Thickness=550µm, Weight=2.806603mg, Width=1.2mm, Working Voltage=5.5V
D2: "DIODE STANDARD 75V 200MA SOD523F", Average Rectified Current=200mA, Forward Current=300mA, Forward Voltage=720mV, Manufacturer=onsemi, Manufacturer Lifecycle Status=ACTIVE, Max Junction Temperature (Tj)=150°C, Max Output current=150mA, Max Power Dissipation=200mW, Max Repetitive Reverse Voltage (Vrrm)=75V, Max Reverse Leakage Current=5µA, Min Operating Temperature=-55°C, Reverse Voltage=100V, Supplier Part Number=1N914BWTCT-ND, Category="Rectifier Diodes", China RoHS=Compliant, ComponentLink1Description=https://datasheet.octopart.com:443/1N914BWT-ON-Semiconductor-datasheet-137236191.pdf?src-supplier=JRH+Electronics, ComponentLink1URL=https://datasheet.octopart.com:443/1N914BWT-ON-Semiconductor-datasheet-137236191.pdf?src-supplier=JRH+Electronics, ComponentLink2Description=https://sigma.octopart.com:443/138897313/technical_drawing/ON-Semiconductor-1N914BWT.pdf?src-supplier=Upverter, ComponentLink2URL=https://sigma.octopart.com:443/138897313/technical_drawing/ON-Semiconductor-1N914BWT.pdf?src-supplier=Upverter, ComponentLink3Description=https://datasheet.octopart.com:443/1N914BWT-ON-Semiconductor-datasheet-8641207.pdf?src-supplier=IHS, ComponentLink3URL=https://datasheet.octopart.com:443/1N914BWT-ON-Semiconductor-datasheet-8641207.pdf?src-supplier=IHS, ComponentLink4Description=https://datasheet.octopart.com:443/1N914BWT-onsemi-datasheet-181265884.pdf?src-supplier=IHS, ComponentLink4URL=https://datasheet.octopart.com:443/1N914BWT-onsemi-datasheet-181265884.pdf?src-supplier=IHS, ComponentLink5Description=https://datasheet.octopart.com:443/1N914BWT-ON-Semiconductor-datasheet-85393215.pdf?src-supplier=onsemi, ComponentLink5URL=https://datasheet.octopart.com:443/1N914BWT-ON-Semiconductor-datasheet-85393215.pdf?src-supplier=onsemi, ComponentLink6Description=https://datasheet.octopart.com:443/1N914BWT-ON-Semiconductor-datasheet-86684494.pdf?src-supplier=onsemi, ComponentLink6URL=https://datasheet.octopart.com:443/1N914BWT-ON-Semiconductor-datasheet-86684494.pdf?src-supplier=onsemi, ComponentLink7Description=https://datasheet.octopart.com:443/1N914BWT-ON-Semiconductor-datasheet-86681974.pdf?src-supplier=element14+APAC, ComponentLink7URL=https://datasheet.octopart.com:443/1N914BWT-ON-Semiconductor-datasheet-86681974.pdf?src-supplier=element14+APAC, ComponentLink8Description=https://datasheet.octopart.com:443/1N914BWT-Fairchild-datasheet-597795.pdf?src-supplier=Future+Electronics, ComponentLink8URL=https://datasheet.octopart.com:443/1N914BWT-Fairchild-datasheet-597795.pdf?src-supplier=Future+Electronics, ComponentLink9Description=https://sigma.octopart.com:443/17343427/technical_drawing/Fairchild-Semiconductor-1N914BWT.pdf?src-supplier=Fairchild+Semiconductor, ComponentLink9URL=https://sigma.octopart.com:443/17343427/technical_drawing/Fairchild-Semiconductor-1N914BWT.pdf?src-supplier=Fairchild+Semiconductor, ComponentLink10Description=https://datasheet.octopart.com:443/1N914BWT-Fairchild-Semiconductor-datasheet-67878665.pdf?src-supplier=Farnell, ComponentLink10URL=https://datasheet.octopart.com:443/1N914BWT-Fairchild-Semiconductor-datasheet-67878665.pdf?src-supplier=Farnell, ComponentLink11Description=https://datasheet.octopart.com:443/1N914BWT-Fairchild-Semiconductor-datasheet-68649996.pdf?src-supplier=Farnell, ComponentLink11URL=https://datasheet.octopart.com:443/1N914BWT-Fairchild-Semiconductor-datasheet-68649996.pdf?src-supplier=Farnell, ComponentLink12Description=https://datasheet.octopart.com:443/1N914BWT-Fairchild-Semiconductor-datasheet-78857206.pdf?src-supplier=Farnell, ComponentLink12URL=https://datasheet.octopart.com:443/1N914BWT-Fairchild-Semiconductor-datasheet-78857206.pdf?src-supplier=Farnell, ComponentLink13Description=https://datasheet.octopart.com:443/1N914BWT-Fairchild-Semiconductor-datasheet-67909706.pdf?src-supplier=Newark, ComponentLink13URL=https://datasheet.octopart.com:443/1N914BWT-Fairchild-Semiconductor-datasheet-67909706.pdf?src-supplier=Newark, ComponentLink14Description=https://datasheet.octopart.com:443/1N914BWT-Fairchild-Semiconductor-datasheet-68364971.pdf?src-supplier=Newark, ComponentLink14URL=https://datasheet.octopart.com:443/1N914BWT-Fairchild-Semiconductor-datasheet-68364971.pdf?src-supplier=Newark, ComponentLink15Description=https://datasheet.octopart.com:443/1N914BWT-Fairchild-Semiconductor-datasheet-71421042.pdf?src-supplier=Newark, ComponentLink15URL=https://datasheet.octopart.com:443/1N914BWT-Fairchild-Semiconductor-datasheet-71421042.pdf?src-supplier=Newark, ComponentLink16Description=http://sigma.octopart.com:80/150599636/rohs_statement/ON-Semiconductor-1N914BWT.pdf?src-supplier=Compliance+Statements, ComponentLink16URL=http://sigma.octopart.com:80/150599636/rohs_statement/ON-Semiconductor-1N914BWT.pdf?src-supplier=Compliance+Statements, ComponentLink17Description=http://sigma.octopart.com:80/17343722/reach_statement/Fairchild-Semiconductor-1N914BWT.pdf?src-supplier=Compliance+Statements, ComponentLink17URL=http://sigma.octopart.com:80/17343722/reach_statement/Fairchild-Semiconductor-1N914BWT.pdf?src-supplier=Compliance+Statements, ComponentLink18Description=http://sigma.octopart.com:80/17343723/materials_sheet/Fairchild-Semiconductor-1N914BWT.pdf?src-supplier=Compliance+Statements, ComponentLink18URL=http://sigma.octopart.com:80/17343723/materials_sheet/Fairchild-Semiconductor-1N914BWT.pdf?src-supplier=Compliance+Statements, ComponentLink19Description=http://sigma.octopart.com:80/33033631/reach_statement/Fairchild-Semiconductor-1N914BWT.pdf?src-supplier=Compliance+Statements, ComponentLink19URL=http://sigma.octopart.com:80/33033631/reach_statement/Fairchild-Semiconductor-1N914BWT.pdf?src-supplier=Compliance+Statements, ComponentLink20Description=http://sigma.octopart.com:80/33033633/materials_sheet/Fairchild-Semiconductor-1N914BWT.pdf?src-supplier=Compliance+Statements, ComponentLink20URL=http://sigma.octopart.com:80/33033633/materials_sheet/Fairchild-Semiconductor-1N914BWT.pdf?src-supplier=Compliance+Statements, ComponentLink21Description=http://sigma.octopart.com:80/reach_statement/ON-Semiconductor-company-79.pdf?src-supplier=Compliance+Statements, ComponentLink21URL=http://sigma.octopart.com:80/reach_statement/ON-Semiconductor-company-79.pdf?src-supplier=Compliance+Statements, ComponentLink22Description=http://sigma.octopart.com:80/rohs_statement/Fairchild-Semiconductor-company-11.pdf?src-supplier=Compliance+Statements, ComponentLink22URL=http://sigma.octopart.com:80/rohs_statement/Fairchild-Semiconductor-company-11.pdf?src-supplier=Compliance+Statements, ComponentLink23Description=http://sigma.octopart.com:80/rohs_statement/Fairchild-Semiconductor-company-10.pdf?src-supplier=Compliance+Statements, ComponentLink23URL=http://sigma.octopart.com:80/rohs_statement/Fairchild-Semiconductor-company-10.pdf?src-supplier=Compliance+Statements, ComponentLink24Description=http://sigma.octopart.com:80/reach_statement/Fairchild-Semiconductor-company-9.pdf?src-supplier=Compliance+Statements, ComponentLink24URL=http://sigma.octopart.com:80/reach_statement/Fairchild-Semiconductor-company-9.pdf?src-supplier=Compliance+Statements, ComponentLink25Description=https://octopart.com:443/opatz8j6/c1?t=AH9zcMxkeAdW6q2Eq6b7IE3o8p7oJyfCCWP2LD7p9dkg8_1XgT_uIYUIfv7lhcHO3Lm2dWJ0vyWcCXTmI-m6i_e3bz1ygKnSbTknupXSFzBNj_HpxZskJCgN2zBylGov1HFklhlqrpHlO6K5AZ62MDKnKfmeey-sKx5zLLXPz3vdpqjCapaf97_w5ymRJ4vykqn37E9iqiVHqZfTnoawsGL7kQ2_tC5XJG82m9dj8CjUa7IyLd46aJZw47PNoUwIy-tktB34mxPYkgoIYMPq_y-2_Zl7oOQxNhckIE8NgxTfVSFSWYFJhemMnrsZ4FmlJAaE9JBv7LsFpjF61P3RKffqM8U7tIBEs0IC&src-supplier=Compliance+Statements, ComponentLink25URL=https://octopart.com:443/opatz8j6/c1?t=AH9zcMxkeAdW6q2Eq6b7IE3o8p7oJyfCCWP2LD7p9dkg8_1XgT_uIYUIfv7lhcHO3Lm2dWJ0vyWcCXTmI-m6i_e3bz1ygKnSbTknupXSFzBNj_HpxZskJCgN2zBylGov1HFklhlqrpHlO6K5AZ62MDKnKfmeey-sKx5zLLXPz3vdpqjCapaf97_w5ymRJ4vykqn37E9iqiVHqZfTnoawsGL7kQ2_tC5XJG82m9dj8CjUa7IyLd46aJZw47PNoUwIy-tktB34mxPYkgoIYMPq_y-2_Zl7oOQxNhckIE8NgxTfVSFSWYFJhemMnrsZ4FmlJAaE9JBv7LsFpjF61P3RKffqM8U7tIBEs0IC&src-supplier=Compliance+Statements, ComponentLink26Description=https://octopart.com:443/opatz8j6/c1?t=xkFbza4jrI2CRbegTQyc3OoFkt0wJLseTZvNZoS9ZK7og4IYeJkRm8Wtlicq30gKrCmXKYAvwhfUWUd8QrgiWtGr-1lPch9YM6_eRKvxcMBeJPMVF6fuXrX8qVzrjdJE_ba4nBK8Av8ejJiUOIqoCK4JwxbrI670KPmrS7lZhK3d4M9ClcgV1EdcA89oUfKfxSXdDQ7ptMPVQyO9dYqcVLlwZjgXP6pJFSDaJyXdYctBiNO3pJoYg6YNiGqR74o654sFLuxF_heBqsxkg6UEULjNDBDBmm8bGtxjuaEt4DFGZZVVzAgQnbURpSvQrJSnNWgco6nydRWV0EfJMGefeNg22mY4HSjyeBXs9g&src-supplier=Compliance+Statements, ComponentLink26URL=https://octopart.com:443/opatz8j6/c1?t=xkFbza4jrI2CRbegTQyc3OoFkt0wJLseTZvNZoS9ZK7og4IYeJkRm8Wtlicq30gKrCmXKYAvwhfUWUd8QrgiWtGr-1lPch9YM6_eRKvxcMBeJPMVF6fuXrX8qVzrjdJE_ba4nBK8Av8ejJiUOIqoCK4JwxbrI670KPmrS7lZhK3d4M9ClcgV1EdcA89oUfKfxSXdDQ7ptMPVQyO9dYqcVLlwZjgXP6pJFSDaJyXdYctBiNO3pJoYg6YNiGqR74o654sFLuxF_heBqsxkg6UEULjNDBDBmm8bGtxjuaEt4DFGZZVVzAgQnbURpSvQrJSnNWgco6nydRWV0EfJMGefeNg22mY4HSjyeBXs9g&src-supplier=Compliance+Statements, Contact Plating=Tin, Country of Origin="Mainland China", Element Configuration=Single, Export Control Classification Number (ECCN) Code=EAR99, Harmonized Tariff Schedule (HTS) Code=8541.10.00.70, Height=700µm, Introduction Date=2008-03-18, Lead Free="Lead Free", Lifecycle Status=Production, Manufacturer Part Number=1N914BWT, Max Operating Temperature=150°C, Max Reverse Voltage (DC)=75V, Mounting Technology="Surface Mount", Number of Elements=1, Number of Terminals=2, Peak Reverse Current=5µA, Pins=2, Power Dissipation=200mW, Pricing="1=0.17, 10=0.102, 50=0.0726, 100=0.0629, 500=0.04556 (USD)", Radiation Hardening=No, REACH SVHC=Yes, Recovery Time=4ns, Reverse Recovery Time=4ns, Reverse Standoff Voltage=75V, RoHS=Compliant, Schedule B="8541100070, 8541100070|8541100070|8541100070|8541100070|8541100070", Stock=1541183, Supplier=DigiKey, Weight=10mg
J1: "USB Connector, 24 Contact(s), Female, Right Angle, Solder Terminal, Locking, Receptacle", Contact Resistance=50mΩ, Current Rating=6.25A, Dielectric Material="Liquid Crystal Polymer", Insulation Color=Black, Insulation Resistance=100MΩ, Manufacturer="Global Connector Technology", Max Operating Temperature=85°C, Min Operating Temperature=-40°C, Supplier Part Number=2073-USB4105-GF-ADKR-ND, Voltage Rating=20V, Category="USB Connectors", China RoHS=Compliant, ComponentLink1Description=https://datasheet.octopart.com:443/USB4105-GF-A-GCT-datasheet-166929323.pdf?src-supplier=SOS+electronic, ComponentLink1URL=https://datasheet.octopart.com:443/USB4105-GF-A-GCT-datasheet-166929323.pdf?src-supplier=SOS+electronic, ComponentLink2Description=https://datasheet.octopart.com:443/USB4105-GF-A-GCT-datasheet-188935996.pdf?src-supplier=TME, ComponentLink2URL=https://datasheet.octopart.com:443/USB4105-GF-A-GCT-datasheet-188935996.pdf?src-supplier=TME, ComponentLink3Description=https://datasheet.octopart.com:443/USB4105-GF-A-GCT-datasheet-188869076.pdf?src-supplier=TME, ComponentLink3URL=https://datasheet.octopart.com:443/USB4105-GF-A-GCT-datasheet-188869076.pdf?src-supplier=TME, ComponentLink4Description=https://datasheet.octopart.com:443/USB4105-GF-A-GCT-datasheet-166927665.pdf?src-supplier=TME, ComponentLink4URL=https://datasheet.octopart.com:443/USB4105-GF-A-GCT-datasheet-166927665.pdf?src-supplier=TME, Contact Material="Gold, Nickel", Country of Origin="Mainland China", Export Control Classification Number (ECCN) Code=EAR99, Gender=Female, Harmonized Tariff Schedule (HTS) Code=8536.69.40.30, Height=3.46mm, Introduction Date=2021-04-29, Lifecycle Status=Production, Manufacturer Part Number=USB4105-GF-A, Number of Contacts=16, Number of Ports=1, Number of Positions=24, Number of Rows=1, Orientation="Right Angle", Pins=16, Pricing="1=0.8, 10=0.676, 25=0.6336, 50=0.6034, 100=0.5745, 250=0.53848 (USD)", REACH SVHC=Yes, RoHS=Compliant, Shell Finish=Nickel, Shell Material="Stainless Steel", Stock=132497, Supplier=DigiKey, Terminal Pitch=500µm, USB Standard="USB 2.0"
J2: "Board Connector, 2 Contact(s), 1 Row(s), Male, Right Angle, Surface Mount Terminal", Case/Package=SMD/SMT, Contact Resistance=20mΩ, Current Rating=2A, Dielectric Material=Polyamide, Insulation Resistance=1GΩ, Manufacturer=JST, Max Operating Temperature=85°C, Min Operating Temperature=-25°C, Ratings="CSA, TUV", Supplier Part Number=455-S2B-PH-SM4-TBDKR-ND, Category="Card Edge Connectors", ComponentLink1Description=https://datasheet.octopart.com:443/S2B-PH-SM4-TB-JST-datasheet-15068535.pdf?src-supplier=IHS, ComponentLink1URL=https://datasheet.octopart.com:443/S2B-PH-SM4-TB-JST-datasheet-15068535.pdf?src-supplier=IHS, ComponentLink2Description=https://datasheet.octopart.com:443/S2B-PH-SM4-TB-JST-datasheet-12510261.pdf?src-supplier=TME, ComponentLink2URL=https://datasheet.octopart.com:443/S2B-PH-SM4-TB-JST-datasheet-12510261.pdf?src-supplier=TME, ComponentLink3Description=https://datasheet.octopart.com:443/S2B-PH-SM4-TB-JST-datasheet-159515011.pdf?src-supplier=HQonline, ComponentLink3URL=https://datasheet.octopart.com:443/S2B-PH-SM4-TB-JST-datasheet-159515011.pdf?src-supplier=HQonline, Contact Plating=Tin, Gender=Male, Height=5.5mm, Length=7.9mm, Lifecycle Status=Production, Manufacturer Part Number=S2B-PH-SM4-TB, Number of Poles=2, Number of Positions=2, Number of Rows=1, Orientation="Right Angle", Pins=2, Pitch=2.0066mm, Pricing="1=0.49, 10=0.417, 100=0.3547, 500=0.31654 (USD)", RoHS=Compliant, Stock=179159, Supplier=DigiKey, Terminal Pitch=2mm, Width=7.6mm
J3: "CONN HEADER SMD 10POS 1.27MM / Connector Header Surface Mount 10 position 0.050\" (1.27mm)", Color=Black, Manufacturer=Samtec, Manufacturer Lifecycle Status=PRODUCTION, Max Current Rating=1.75A, Max Operating Temperature=125°C, Min Operating Temperature=-55°C, Supplier Part Number=SAM8799-ND, Category="Headers and Wire Housings", ComponentLink1Description=https://datasheet.octopart.com:443/FTSH-105-01-L-DV-K-Samtec-datasheet-140825048.pdf?src-supplier=Electro+Sonic, ComponentLink1URL=https://datasheet.octopart.com:443/FTSH-105-01-L-DV-K-Samtec-datasheet-140825048.pdf?src-supplier=Electro+Sonic, ComponentLink2Description=https://datasheet.octopart.com:443/FTSH-105-01-L-DV-K-Samtec-datasheet-86818370.pdf?src-supplier=Upverter, ComponentLink2URL=https://datasheet.octopart.com:443/FTSH-105-01-L-DV-K-Samtec-datasheet-86818370.pdf?src-supplier=Upverter, ComponentLink3Description=https://datasheet.octopart.com:443/FTSH-105-01-L-DV-K-Samtec-datasheet-97029545.pdf?src-supplier=Newark, ComponentLink3URL=https://datasheet.octopart.com:443/FTSH-105-01-L-DV-K-Samtec-datasheet-97029545.pdf?src-supplier=Newark, ComponentLink4Description=https://datasheet.octopart.com:443/FTSH-105-01-L-DV-K-Samtec-datasheet-41642889.pdf?src-supplier=Newark, ComponentLink4URL=https://datasheet.octopart.com:443/FTSH-105-01-L-DV-K-Samtec-datasheet-41642889.pdf?src-supplier=Newark, ComponentLink5Description=https://sigma.octopart.com:443/140871554/technical_drawing/Samtec-FTSH-105-01-L-DV-K.pdf?src-supplier=Samtec, ComponentLink5URL=https://sigma.octopart.com:443/140871554/technical_drawing/Samtec-FTSH-105-01-L-DV-K.pdf?src-supplier=Samtec, ComponentLink6Description=https://sigma.octopart.com:443/97029548/technical_drawing/Samtec-FTSH-105-01-L-DV-K.pdf?src-supplier=Samtec, ComponentLink6URL=https://sigma.octopart.com:443/97029548/technical_drawing/Samtec-FTSH-105-01-L-DV-K.pdf?src-supplier=Samtec, ComponentLink7Description=https://datasheet.octopart.com:443/FTSH-105-01-L-DV-K-Samtec-datasheet-100454331.pdf?src-supplier=Farnell, ComponentLink7URL=https://datasheet.octopart.com:443/FTSH-105-01-L-DV-K-Samtec-datasheet-100454331.pdf?src-supplier=Farnell, ComponentLink8Description=https://datasheet.octopart.com:443/FTSH-105-01-L-DV-K-Samtec-datasheet-33007714.pdf?src-supplier=Farnell, ComponentLink8URL=https://datasheet.octopart.com:443/FTSH-105-01-L-DV-K-Samtec-datasheet-33007714.pdf?src-supplier=Farnell, ComponentLink9Description=https://datasheet.octopart.com:443/FTSH-105-01-L-DV-K-Samtec-datasheet-16646209.pdf?src-supplier=element14+APAC, ComponentLink9URL=https://datasheet.octopart.com:443/FTSH-105-01-L-DV-K-Samtec-datasheet-16646209.pdf?src-supplier=element14+APAC, ComponentLink10Description=https://datasheet.octopart.com:443/FTSH-105-01-L-DV-K-Samtec-datasheet-180249087.pdf?src-supplier=JRH+Electronics, ComponentLink10URL=https://datasheet.octopart.com:443/FTSH-105-01-L-DV-K-Samtec-datasheet-180249087.pdf?src-supplier=JRH+Electronics, ComponentLink11Description=https://datasheet.octopart.com:443/FTSH-105-01-L-DV-K-Samtec-datasheet-176663386.pdf?src-supplier=Toby+Electronics, ComponentLink11URL=https://datasheet.octopart.com:443/FTSH-105-01-L-DV-K-Samtec-datasheet-176663386.pdf?src-supplier=Toby+Electronics, ComponentLink12Description=https://datasheet.octopart.com:443/FTSH-105-01-L-DV-K-Samtec-datasheet-133497664.pdf?src-supplier=Toby+Electronics, ComponentLink12URL=https://datasheet.octopart.com:443/FTSH-105-01-L-DV-K-Samtec-datasheet-133497664.pdf?src-supplier=Toby+Electronics, ComponentLink13Description=https://datasheet.octopart.com:443/FTSH-105-01-L-DV-K-Samtec-datasheet-116535196.pdf?src-supplier=Toby+Electronics, ComponentLink13URL=https://datasheet.octopart.com:443/FTSH-105-01-L-DV-K-Samtec-datasheet-116535196.pdf?src-supplier=Toby+Electronics, ComponentLink14Description=https://datasheet.octopart.com:443/FTSH-105-01-L-DV-K-Samtec-datasheet-151470459.pdf?src-supplier=Sager+Electronics, ComponentLink14URL=https://datasheet.octopart.com:443/FTSH-105-01-L-DV-K-Samtec-datasheet-151470459.pdf?src-supplier=Sager+Electronics, ComponentLink15Description=https://datasheet.octopart.com:443/FTSH-105-01-L-DV-K-Samtec-datasheet-151470458.pdf?src-supplier=Sager+Electronics, ComponentLink15URL=https://datasheet.octopart.com:443/FTSH-105-01-L-DV-K-Samtec-datasheet-151470458.pdf?src-supplier=Sager+Electronics, ComponentLink16Description=https://datasheet.octopart.com:443/FTSH-105-01-L-DV-K-Samtec-datasheet-137316104.pdf?src-supplier=Future+Electronics, ComponentLink16URL=https://datasheet.octopart.com:443/FTSH-105-01-L-DV-K-Samtec-datasheet-137316104.pdf?src-supplier=Future+Electronics, ComponentLink17Description=https://datasheet.octopart.com/FTSH-105-01-L-DV-K-Samtec-datasheet-13696953.pdf, ComponentLink17URL=https://datasheet.octopart.com/FTSH-105-01-L-DV-K-Samtec-datasheet-13696953.pdf, ComponentLink18Description=https://datasheet.octopart.com/FTSH-105-01-L-DV-K-Samtec-datasheet-11553404.pdf, ComponentLink18URL=https://datasheet.octopart.com/FTSH-105-01-L-DV-K-Samtec-datasheet-11553404.pdf, Connector Type="Male Pin", Contact Material=Bronze, Contact Mating Length=3.048mm, Contact Plating=Gold, Depth=3.43mm, Gender=Female, Housing Color=Black, Housing Material=Polymer, Lead Free="Lead Free", Length=6.35mm, Lifecycle Status=Production, Manufacturer Part Number=FTSH-105-01-L-DV-K, Mounting Technology="Surface Mount", Number of Contacts=10, Number of Positions=10, Number of Rows=2, Pins=10, Pitch=1.27mm, Pricing="1=1.37, 100=1.075, 250=0.972, 500=0.855, 1000=0.753, 2500=0.68, 5000=0.607, 10000=0.52375 (USD)", Radiation Hardening=No, REACH SVHC=No, RoHS=Compliant, Row Spacing=1.27mm, Stock=47624, Supplier=DigiKey, Termination=Solder
J4 J5: library part FCR7350, "4 mm shrouded banana socket, PCB mount", Color=Red, Current Rating=24A, Manufacturer=Cliff, Manufacturer Part Number=FCR7350R, Supplier Part Number=4654-FCR7350R-ND, Voltage Rating=1kV, Category=Connectors, ComponentLink1Description=https://datasheet.octopart.com:443/FCR7350R-Cliff-datasheet-67476090.pdf?src-supplier=IHS, ComponentLink1URL=https://datasheet.octopart.com:443/FCR7350R-Cliff-datasheet-67476090.pdf?src-supplier=IHS, ComponentLink2Description=https://datasheet.octopart.com:443/FCR7350R-Cliff-datasheet-10025950.pdf?src-supplier=element14+APAC, ComponentLink2URL=https://datasheet.octopart.com:443/FCR7350R-Cliff-datasheet-10025950.pdf?src-supplier=element14+APAC, ComponentLink3Description=https://datasheet.octopart.com:443/FCR7350R-Cliff-datasheet-188862624.pdf?src-supplier=TME, ComponentLink3URL=https://datasheet.octopart.com:443/FCR7350R-Cliff-datasheet-188862624.pdf?src-supplier=TME, ComponentLink4Description=https://datasheet.octopart.com:443/FCR7350R-Cliff-datasheet-10027538.pdf?src-supplier=Farnell, ComponentLink4URL=https://datasheet.octopart.com:443/FCR7350R-Cliff-datasheet-10027538.pdf?src-supplier=Farnell, Connector Type=Socket, Contact Material=Gold, Contact Plating=Gold, Gender=Receptacle, Height=10.922mm, Insulation Material=PVC, Lifecycle Status=Production, Mounting Technology="Through Hole", Pricing="1=7.66, 10=6.509, 25=6.1016, 50=5.8102, 100=5.5327, 300=5.12017, 500=4.93902, 1000=4.70352 (USD)", REACH SVHC=Yes, RoHS=Compliant, Stock=10020, Supplier=DigiKey, Termination="Through Hole", Voltage Rating (DC)=1kV, Weight=4.535924g, Width=11.938mm
J6: library part J_MODULE_BUS, "10-pin stackable module interface for power, I2C, SPI, and shared interrupt"
K1: library part TQ2-3V, "Electromechanical Relay Double Pole Double Throw 1A 3 Volt 64.3Ohm Through Hole", Case/Package=DIP, Coil Current=47mA, Coil Power=140mW, Coil Resistance=64.3Ω, Coil Voltage (DC)=2.25V, Contact Current Rating=1A, Contact Resistance=50Ω, Contact Voltage Rating (AC)=125V, Manufacturer=Panasonic, Manufacturer Lifecycle Status=ACTIVE, Max Operating Temperature=70°C, Max Voltage Rating (DC)=110V, Min Operating Temperature=-40°C, Power Dissipation=140W, Ratings=CSA, Supplier Part Number=255-1225-5-ND, Category="Signal Relays", Coil Type=Non-Latching, ComponentLink1Description=https://datasheet.octopart.com:443/TQ2-3V-Panasonic-datasheet-8361856.pdf?src-supplier=Panasonic, ComponentLink1URL=https://datasheet.octopart.com:443/TQ2-3V-Panasonic-datasheet-8361856.pdf?src-supplier=Panasonic, ComponentLink2Description=https://datasheet.octopart.com:443/TQ2-3V-Panasonic-datasheet-11522959.pdf?src-supplier=Panasonic, ComponentLink2URL=https://datasheet.octopart.com:443/TQ2-3V-Panasonic-datasheet-11522959.pdf?src-supplier=Panasonic, ComponentLink3Description=https://datasheet.octopart.com:443/TQ2-3V-Panasonic-datasheet-34148902.pdf?src-supplier=IHS, ComponentLink3URL=https://datasheet.octopart.com:443/TQ2-3V-Panasonic-datasheet-34148902.pdf?src-supplier=IHS, ComponentLink4Description=https://datasheet.octopart.com:443/TQ2-3V-Panasonic-datasheet-109883.pdf?src-supplier=element14, ComponentLink4URL=https://datasheet.octopart.com:443/TQ2-3V-Panasonic-datasheet-109883.pdf?src-supplier=element14, ComponentLink5Description=https://datasheet.octopart.com:443/TQ2-3V-Panasonic-datasheet-16066.pdf?src-supplier=element14, ComponentLink5URL=https://datasheet.octopart.com:443/TQ2-3V-Panasonic-datasheet-16066.pdf?src-supplier=element14, ComponentLink6Description=https://datasheet.octopart.com:443/TQ2-3V-Panasonic-datasheet-12570800.pdf?src-supplier=Farnell, ComponentLink6URL=https://datasheet.octopart.com:443/TQ2-3V-Panasonic-datasheet-12570800.pdf?src-supplier=Farnell, ComponentLink7Description=https://datasheet.octopart.com:443/TQ2-3V-Panasonic-datasheet-136735749.pdf?src-supplier=Electro+Sonic, ComponentLink7URL=https://datasheet.octopart.com:443/TQ2-3V-Panasonic-datasheet-136735749.pdf?src-supplier=Electro+Sonic, ComponentLink8Description=https://datasheet.octopart.com:443/TQ2-3V-Panasonic-datasheet-27895613.pdf?src-supplier=Electro+Sonic, ComponentLink8URL=https://datasheet.octopart.com:443/TQ2-3V-Panasonic-datasheet-27895613.pdf?src-supplier=Electro+Sonic, ComponentLink9Description=https://datasheet.octopart.com:443/TQ2-3V-Panasonic-EW-datasheet-23711783.pdf?src-supplier=Electro+Sonic, ComponentLink9URL=https://datasheet.octopart.com:443/TQ2-3V-Panasonic-EW-datasheet-23711783.pdf?src-supplier=Electro+Sonic, ComponentLink10Description=https://datasheet.octopart.com:443/TQ2-3V-Panasonic-datasheet-164871806.pdf?src-supplier=Burklin+Elektronik, ComponentLink10URL=https://datasheet.octopart.com:443/TQ2-3V-Panasonic-datasheet-164871806.pdf?src-supplier=Burklin+Elektronik, ComponentLink11Description=https://datasheet.octopart.com:443/TQ2-3V-Panasonic-datasheet-152536022.pdf?src-supplier=Master+Electronics, ComponentLink11URL=https://datasheet.octopart.com:443/TQ2-3V-Panasonic-datasheet-152536022.pdf?src-supplier=Master+Electronics, ComponentLink12Description=https://datasheet.octopart.com:443/TQ2-3V-Panasonic-datasheet-138897391.pdf?src-supplier=Sager+Electronics, ComponentLink12URL=https://datasheet.octopart.com:443/TQ2-3V-Panasonic-datasheet-138897391.pdf?src-supplier=Sager+Electronics, ComponentLink13Description=https://datasheet.octopart.com:443/TQ2-3V-Panasonic-datasheet-13694242.pdf?src-supplier=_legacy+Avnet, ComponentLink13URL=https://datasheet.octopart.com:443/TQ2-3V-Panasonic-datasheet-13694242.pdf?src-supplier=_legacy+Avnet, ComponentLink14Description=https://datasheet.octopart.com:443/TQ2-3V-Panasonic-datasheet-7279417.pdf?src-supplier=Jameco+(USA), ComponentLink14URL=https://datasheet.octopart.com:443/TQ2-3V-Panasonic-datasheet-7279417.pdf?src-supplier=Jameco+(USA), Contact Material="Gold, Silver", Contact Plating="Gold, Silver", Current Rating=1A, Depth=9mm, Electrical Life=200kcycles, Height=5mm, Insertion Loss (dB)=0.6dB, Lead Free="Lead Free", Length=14mm, Lifecycle Status=Production, Manufacturer Part Number=TQ2-3V, Max Current Rating=1A, Max Voltage Rating (AC)=125V, Mounting Technology="Through Hole", Number of Contacts=2, Operate Time=3ms, Packaging=Bulk, Pins=8, Power Consumption=140mW, Pricing="1=2.36, 10=2.103, 25=2.0084, 50=1.9398, 100=1.8734, 250=1.78892, 500=1.72756, 1000=1.66825, 5000=1.53812 (USD)", Radiation Hardening=No, REACH SVHC=Yes, Relay Type=Telecom, Release Time=3ms, Response Time=3ms, RoHS=Compliant, Stock=2058, Supplier=DigiKey, Supplier 1="Future Electronics", Supplier Part Number 1=TQ2-3V, Switching Current=1A, Termination=Solder, Throw Configuration=DPDT, Type=Electromechanical, Voltage Rating (AC)=125V, Voltage Rating (DC)=110V, Weight=1.5g, Width=9mm